# Altium PCB UWB_R_v1.4.PcbDoc (part 1 of 2)
Units mm, origin at the board's own origin, x right, y up, seen from the top; angles counter-clockwise.
Board outline 610.01 x 38.17 mm, 2 copper layers (Top Layer, Bottom Layer); 33 components, 49 nets, 295 pads, 132 vias.
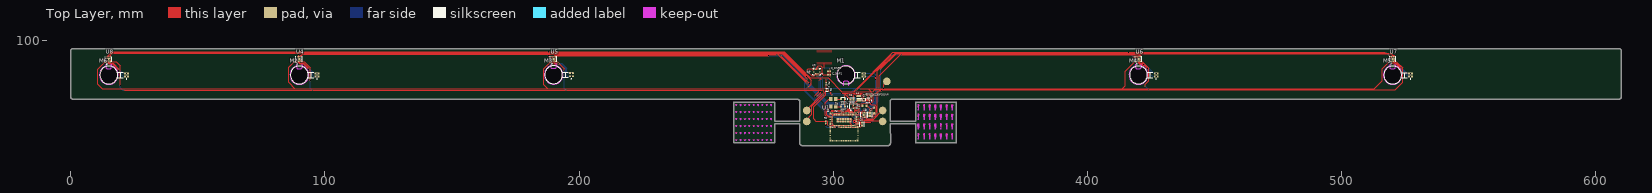
[diagram p0: Top Layer view]
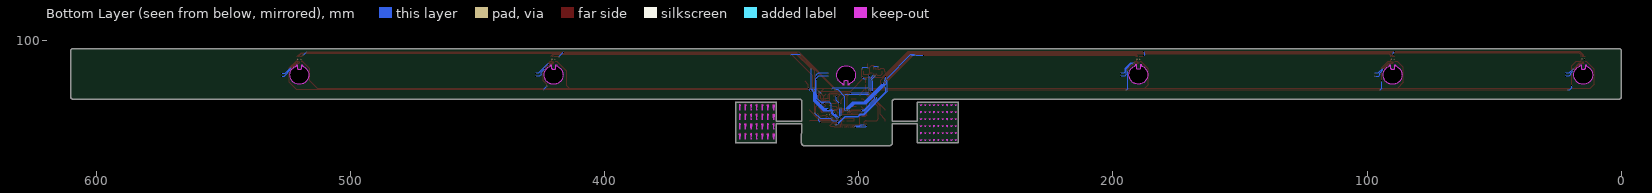
[diagram p1: Bottom Layer view, seen from below]
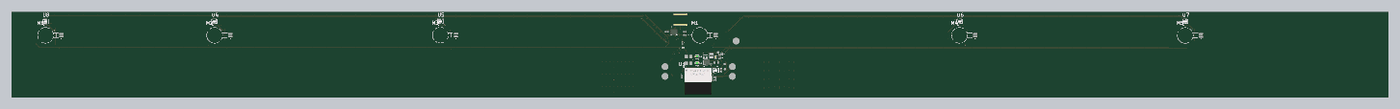
[diagram p3: 3D render of the assembled board from above, using the file's embedded part models]

## Layer stack, top to bottom
Top Layer: signal copper 0.0356
Dielectric 1: dielectric 0.32, FR-4, Dk 4.8
Bottom Layer: signal copper 0.0356

## Board outline
260.896,59.964 276.896,59.964 276.903,59.971 276.903,67.464 286.812,67.464 286.8,59.845 ccw(c287.807,59.843) 287.807,58.836 321.505,58.836 ccw(c321.505,59.843) 322.512,59.843 322.512,59.854 322.429,67.464 332.41,67.464 332.41,59.971 332.416,59.964 348.416,59.964 348.423,59.971 348.423,75.971 348.416,75.978 332.416,75.978 332.41,75.971 332.41,68.478 322.423,68.478 322.334,76.088 cw(c323.327,76.099) 323.327,77.092 609.006,77.092 ccw(c609.006,78.099) 610.013,78.099 610.013,95.995 ccw(c609.006,95.995) 609.006,97.002 1.006,97.002 ccw(c1.006,95.995) 0,95.995 0,78.099 ccw(c1.006,78.099) 1.006,77.092 285.832,77.092 cw(c285.832,76.099) 286.826,76.099 286.826,76.097 286.814,68.478 276.903,68.478 276.903,75.971 276.896,75.978 260.896,75.978 260.889,75.971
cut-out: 346.78,72.827 346.593,74.971 346.693,74.971 346.78,73.975 346.867,74.971 346.968,74.971 346.88,73.966
cut-out: 346.78,69.013 346.593,71.157 346.693,71.157 346.78,70.16 346.867,71.157 346.968,71.157 346.88,70.152
cut-out: 344.38,74.971 344.48,74.971 344.567,73.975 344.655,74.971 344.755,74.971 344.667,73.966 344.567,72.827
cut-out: 342.355,72.827 342.167,74.971 342.267,74.971 342.355,73.975 342.442,74.971 342.542,74.971 342.454,73.966
cut-out: 342.355,69.013 342.167,71.157 342.267,71.157 342.355,70.16 342.442,71.157 342.542,71.157 342.454,70.152
cut-out: 346.593,67.342 346.693,67.342 346.78,66.346 346.867,67.342 346.968,67.342 346.88,66.337 346.78,65.199
cut-out: 346.78,62.532 346.693,63.528 346.593,63.528 346.78,61.384 346.88,62.523 346.968,63.528 346.867,63.528
cut-out: 344.567,69.013 344.38,71.157 344.48,71.157 344.567,70.16 344.655,71.157 344.755,71.157 344.667,70.152
cut-out: 344.567,66.346 344.48,67.342 344.38,67.342 344.567,65.199 344.667,66.337 344.755,67.342 344.655,67.342
cut-out: 342.355,65.199 342.454,66.337 342.542,67.342 342.442,67.342 342.355,66.346 342.267,67.342 342.167,67.342
cut-out: 344.38,63.528 344.48,63.528 344.567,62.532 344.655,63.528 344.755,63.528 344.667,62.523 344.567,61.384
cut-out: 342.355,61.384 342.167,63.528 342.267,63.528 342.355,62.532 342.442,63.528 342.542,63.528 342.454,62.523
cut-out: 340.142,72.827 339.954,74.971 340.055,74.971 340.142,73.975 340.229,74.971 340.329,74.971 340.241,73.966
cut-out: 337.929,73.975 338.016,74.971 338.117,74.971 338.029,73.966 337.929,72.827 337.742,74.971 337.842,74.971
cut-out: 340.142,69.013 339.954,71.157 340.055,71.157 340.142,70.16 340.229,71.157 340.329,71.157 340.241,70.152
cut-out: 337.929,69.013 337.742,71.157 337.842,71.157 337.929,70.16 338.016,71.157 338.117,71.157 338.029,70.152
cut-out: 335.716,72.827 335.816,73.966 335.904,74.971 335.803,74.971 335.716,73.975 335.629,74.971 335.529,74.971
cut-out: 333.503,73.975 333.416,74.971 333.316,74.971 333.503,72.827 333.603,73.966 333.691,74.971 333.591,74.971
cut-out: 335.716,69.013 335.529,71.157 335.629,71.157 335.716,70.16 335.803,71.157 335.904,71.157 335.816,70.152
cut-out: 333.503,70.16 333.416,71.157 333.316,71.157 333.503,69.013 333.603,70.152 333.691,71.157 333.591,71.157
cut-out: 340.142,65.199 339.954,67.342 340.055,67.342 340.142,66.346 340.229,67.342 340.329,67.342 340.241,66.337
cut-out: 337.929,65.199 338.029,66.337 338.117,67.342 338.016,67.342 337.929,66.346 337.842,67.342 337.742,67.342
cut-out: 340.142,62.532 340.229,63.528 340.329,63.528 340.241,62.523 340.142,61.384 339.954,63.528 340.055,63.528
cut-out: 337.929,61.384 338.029,62.523 338.117,63.528 338.016,63.528 337.929,62.532 337.842,63.528 337.742,63.528
cut-out: 335.716,65.199 335.529,67.342 335.629,67.342 335.716,66.346 335.803,67.342 335.904,67.342 335.816,66.337
cut-out: 333.503,65.199 333.316,67.342 333.416,67.342 333.503,66.346 333.591,67.342 333.691,67.342 333.603,66.337
cut-out: 335.716,61.384 335.816,62.523 335.904,63.528 335.803,63.528 335.716,62.532 335.629,63.528 335.529,63.528
cut-out: 333.503,62.532 333.416,63.528 333.316,63.528 333.503,61.384 333.603,62.523 333.691,63.528 333.591,63.528
cut-out: 303.902,82.584 ccw(c304.002,82.584) 304.002,82.484 ccw(c304.002,82.584) 304.102,82.584 304.102,83.775 cw(c304.602,83.775) 304.602,84.275 305.402,84.275 cw(c305.402,83.775) 305.902,83.775 305.902,82.584 ccw(c306.002,82.584) 306.002,82.484 ccw(c306.002,82.584) 306.102,82.584 306.102,82.714 cw(c306.602,82.714) 306.408,83.174 306.407,83.174 ccw(c304.97,86.584) 303.59,83.151 303.589,83.151 cw(c303.402,82.688) 303.902,82.688
cut-out: 14.106,89.429 14.106,90.62 ccw(c14.006,90.62) 14.006,90.72 ccw(c14.006,90.62) 13.906,90.62 13.906,90.491 cw(c13.406,90.49) 13.601,90.03 13.602,90.03 ccw(c15.038,86.62) 16.418,90.053 16.42,90.053 cw(c16.606,90.517) 16.106,90.517 16.106,90.62 ccw(c16.006,90.62) 16.006,90.72 ccw(c16.006,90.62) 15.906,90.62 15.906,89.429 cw(c15.406,89.429) 15.406,88.929 14.606,88.929 cw(c14.606,89.429)
cut-out: 189.075,89.498 189.075,90.688 ccw(c188.975,90.688) 188.975,90.788 ccw(c188.975,90.688) 188.875,90.688 188.875,90.559 cw(c188.375,90.559) 188.569,90.098 188.57,90.099 ccw(c190.006,86.689) 191.388,90.121 cw(c191.575,90.585) 191.075,90.585 191.075,90.688 ccw(c190.975,90.688) 190.975,90.788 ccw(c190.975,90.688) 190.875,90.688 190.875,89.498 cw(c190.375,89.498) 190.375,88.998 189.575,88.998 cw(c189.575,89.498)
cut-out: 189.075,89.498 189.075,90.688 ccw(c188.975,90.688) 188.975,90.788 ccw(c188.975,90.688) 188.875,90.688 188.875,90.559 cw(c188.375,90.559) 188.569,90.098 188.57,90.099 ccw(c190.006,86.689) 191.388,90.121 cw(c191.575,90.585) 191.075,90.585 191.075,90.688 ccw(c190.975,90.688) 190.975,90.788 ccw(c190.975,90.688) 190.875,90.688 190.875,89.498 cw(c190.375,89.498) 190.375,88.998 189.575,88.998 cw(c189.575,89.498)
cut-out: 89.075,89.429 89.075,90.62 ccw(c88.975,90.62) 88.975,90.72 ccw(c88.975,90.62) 88.875,90.62 88.875,90.491 cw(c88.375,90.49) 88.569,90.03 88.57,90.03 ccw(c90.006,86.62) 91.386,90.053 91.388,90.053 cw(c91.575,90.517) 91.075,90.517 91.075,90.62 ccw(c90.975,90.62) 90.975,90.72 ccw(c90.975,90.62) 90.875,90.62 90.875,89.429 cw(c90.375,89.429) 90.375,88.929 89.575,88.929 cw(c89.575,89.429)
cut-out: 89.075,89.429 89.075,90.62 ccw(c88.975,90.62) 88.975,90.72 ccw(c88.975,90.62) 88.875,90.62 88.875,90.491 cw(c88.375,90.49) 88.569,90.03 88.57,90.03 ccw(c90.006,86.62) 91.386,90.053 91.388,90.053 cw(c91.575,90.517) 91.075,90.517 91.075,90.62 ccw(c90.975,90.62) 90.975,90.72 ccw(c90.975,90.62) 90.875,90.62 90.875,89.429 cw(c90.375,89.429) 90.375,88.929 89.575,88.929 cw(c89.575,89.429)
cut-out: 519.075,89.429 519.075,90.62 ccw(c518.975,90.62) 518.975,90.72 ccw(c518.975,90.62) 518.875,90.62 518.875,90.491 cw(c518.375,90.49) 518.569,90.03 518.57,90.03 ccw(c520.006,86.62) 521.386,90.053 521.388,90.053 cw(c521.575,90.517) 521.075,90.517 521.075,90.62 ccw(c520.975,90.62) 520.975,90.72 ccw(c520.975,90.62) 520.875,90.62 520.875,89.429 cw(c520.375,89.429) 520.375,88.929 519.575,88.929 cw(c519.575,89.429)
cut-out: 418.569,90.03 ccw(c420.006,86.619) 421.386,90.053 421.388,90.053 cw(c421.575,90.517) 421.075,90.517 421.075,90.62 ccw(c420.975,90.62) 420.975,90.72 ccw(c420.975,90.62) 420.875,90.62 420.875,89.429 cw(c420.375,89.429) 420.375,88.929 419.575,88.929 cw(c419.575,89.429) 419.075,89.429 419.075,90.62 ccw(c418.975,90.62) 418.975,90.72 ccw(c418.975,90.62) 418.875,90.62 418.875,90.491 cw(c418.375,90.49)
cut-out: 519.075,89.429 519.075,90.62 ccw(c518.975,90.62) 518.975,90.72 ccw(c518.975,90.62) 518.875,90.62 518.875,90.491 cw(c518.375,90.49) 518.569,90.03 518.57,90.03 ccw(c520.006,86.62) 521.386,90.053 521.388,90.053 cw(c521.575,90.517) 521.075,90.517 521.075,90.62 ccw(c520.975,90.62) 520.975,90.72 ccw(c520.975,90.62) 520.875,90.62 520.875,89.429 cw(c520.375,89.429) 520.375,88.929 519.575,88.929 cw(c519.575,89.429)
cut-out: 419.075,89.429 419.075,90.62 ccw(c418.975,90.62) 418.975,90.72 ccw(c418.975,90.62) 418.875,90.62 418.875,90.491 cw(c418.375,90.49) 418.569,90.03 418.57,90.03 ccw(c420.006,86.62) 421.386,90.053 421.388,90.053 cw(c421.575,90.517) 421.075,90.517 421.075,90.62 ccw(c420.975,90.62) 420.975,90.72 ccw(c420.975,90.62) 420.875,90.62 420.875,89.429 cw(c420.375,89.429) 420.375,88.929 419.575,88.929 cw(c419.575,89.429)
cut-out: 303.902,82.584 ccw(c304.002,82.584) 304.002,82.484 ccw(c304.002,82.584) 304.102,82.584 304.102,83.775 cw(c304.602,83.775) 304.602,84.275 305.402,84.275 cw(c305.402,83.775) 305.902,83.775 305.902,82.584 ccw(c306.002,82.584) 306.002,82.484 ccw(c306.002,82.584) 306.102,82.584 306.102,82.714 cw(c306.602,82.714) 306.408,83.174 306.407,83.174 ccw(c304.97,86.584) 303.59,83.151 303.589,83.151 cw(c303.402,82.688) 303.902,82.688
cut-out: 271.87,63.9 272.11,63.484 272.351,63.901 272.235,63.901 272.11,63.684 271.985,63.9
cut-out: 271.87,61.132 272.11,60.716 272.351,61.133 272.235,61.133 272.11,60.916 271.985,61.132
cut-out: 270.274,63.9 270.399,63.684 270.524,63.901 270.639,63.901 270.399,63.484 270.158,63.9
cut-out: 270.274,61.132 270.399,60.916 270.524,61.133 270.639,61.133 270.399,60.716 270.158,61.132
cut-out: 266.736,61.132 266.976,60.716 267.216,61.133 267.101,61.133 266.976,60.916 266.851,61.132
cut-out: 266.736,74.971 266.976,74.555 267.216,74.972 267.101,74.972 266.976,74.755 266.851,74.971
cut-out: 265.024,74.971 265.14,74.971 265.264,74.755 265.39,74.972 265.505,74.972 265.264,74.555
cut-out: 263.313,74.971 263.553,74.555 263.794,74.972 263.678,74.972 263.553,74.755 263.428,74.971
cut-out: 265.024,61.132 265.14,61.132 265.264,60.916 265.39,61.133 265.505,61.133 265.264,60.716
cut-out: 268.447,72.203 268.687,71.787 268.928,72.204 268.812,72.204 268.687,71.987 268.562,72.203
cut-out: 268.562,69.435 268.687,69.219 268.812,69.436 268.928,69.436 268.687,69.019 268.447,69.435
cut-out: 266.736,72.203 266.976,71.787 267.216,72.204 267.101,72.204 266.976,71.987 266.851,72.203
cut-out: 266.736,69.435 266.976,69.019 267.216,69.436 267.101,69.436 266.976,69.219 266.851,69.435
cut-out: 265.024,72.203 265.14,72.203 265.264,71.987 265.39,72.204 265.505,72.204 265.264,71.787
cut-out: 265.024,69.435 265.14,69.435 265.264,69.219 265.39,69.436 265.505,69.436 265.264,69.019
cut-out: 263.313,69.435 263.553,69.019 263.794,69.436 263.678,69.436 263.553,69.219 263.428,69.435
cut-out: 263.313,72.203 263.553,71.787 263.794,72.204 263.678,72.204 263.553,71.987 263.428,72.203
cut-out: 261.601,72.203 261.841,71.787 262.082,72.204 261.967,72.204 261.841,71.987 261.717,72.203
cut-out: 261.601,69.435 261.841,69.019 262.082,69.436 261.967,69.436 261.841,69.219 261.717,69.435
cut-out: 268.562,66.668 268.687,66.452 268.812,66.668 268.928,66.668 268.687,66.252 268.447,66.668
cut-out: 263.313,61.132 263.553,60.716 263.794,61.133 263.678,61.133 263.553,60.916 263.428,61.132
cut-out: 268.447,63.9 268.687,63.484 268.928,63.901 268.812,63.901 268.687,63.684 268.562,63.9
cut-out: 268.562,61.132 268.687,60.916 268.812,61.133 268.928,61.133 268.687,60.716 268.447,61.132
cut-out: 266.736,63.9 266.976,63.484 267.216,63.901 267.101,63.901 266.976,63.684 266.851,63.9
cut-out: 261.717,61.132 261.841,60.916 261.967,61.133 262.082,61.133 261.841,60.716 261.601,61.132
cut-out: 270.274,72.203 270.399,71.987 270.524,72.204 270.639,72.204 270.399,71.787 270.158,72.203
cut-out: 268.447,74.971 268.687,74.555 268.928,74.972 268.812,74.972 268.687,74.755 268.562,74.971
cut-out: 261.601,74.971 261.841,74.555 262.082,74.972 261.967,74.972 261.841,74.755 261.717,74.971
cut-out: 266.736,66.668 266.976,66.252 267.216,66.668 267.101,66.668 266.976,66.452 266.851,66.668
cut-out: 265.024,66.668 265.14,66.668 265.264,66.452 265.39,66.668 265.505,66.668 265.264,66.252
cut-out: 263.313,66.668 263.553,66.252 263.794,66.668 263.678,66.668 263.553,66.452 263.428,66.668
cut-out: 261.601,66.668 261.841,66.252 262.082,66.668 261.967,66.668 261.841,66.452 261.717,66.668
cut-out: 265.024,63.9 265.264,63.484 265.505,63.901 265.39,63.901 265.264,63.684 265.14,63.9
cut-out: 263.313,63.9 263.553,63.484 263.794,63.901 263.678,63.901 263.553,63.684 263.428,63.9
cut-out: 273.581,66.668 273.821,66.252 274.062,66.668 273.947,66.668 273.821,66.452 273.697,66.668
cut-out: 273.581,63.9 273.821,63.484 274.062,63.901 273.947,63.901 273.821,63.684 273.697,63.9
cut-out: 271.87,66.668 272.11,66.252 272.351,66.668 272.235,66.668 272.11,66.452 271.985,66.668
cut-out: 273.581,61.132 273.821,60.716 274.062,61.133 273.947,61.133 273.821,60.916 273.697,61.132
cut-out: 270.274,66.668 270.399,66.452 270.524,66.668 270.639,66.668 270.399,66.252 270.158,66.668
cut-out: 271.87,74.971 272.11,74.555 272.351,74.972 272.235,74.972 272.11,74.755 271.985,74.971
cut-out: 270.158,74.971 270.399,74.555 270.639,74.972 270.524,74.972 270.399,74.755 270.274,74.971
cut-out: 271.87,72.203 272.11,71.787 272.351,72.204 272.235,72.204 272.11,71.987 271.985,72.203
cut-out: 261.601,63.9 261.717,63.9 261.841,63.684 261.967,63.901 262.082,63.901 261.841,63.484
cut-out: 275.293,74.971 275.533,74.555 275.774,74.972 275.658,74.972 275.533,74.755 275.408,74.971
cut-out: 273.581,74.971 273.821,74.555 274.062,74.972 273.947,74.972 273.821,74.755 273.697,74.971
cut-out: 275.293,72.203 275.408,72.203 275.533,71.987 275.658,72.204 275.774,72.204 275.533,71.787
cut-out: 275.293,69.435 275.533,69.019 275.774,69.436 275.658,69.436 275.533,69.219 275.408,69.435
cut-out: 273.581,72.203 273.821,71.787 274.062,72.204 273.947,72.204 273.821,71.987 273.697,72.203
cut-out: 273.581,69.435 273.821,69.019 274.062,69.436 273.947,69.436 273.821,69.219 273.697,69.435
cut-out: 271.87,69.435 272.11,69.019 272.351,69.436 272.235,69.436 272.11,69.219 271.985,69.435
cut-out: 270.158,69.435 270.399,69.019 270.639,69.436 270.524,69.436 270.399,69.219 270.274,69.435
cut-out: 275.293,66.668 275.533,66.252 275.774,66.668 275.658,66.668 275.533,66.452 275.408,66.668
cut-out: 275.293,63.9 275.408,63.9 275.533,63.684 275.658,63.901 275.774,63.901 275.533,63.484
cut-out: 275.293,61.132 275.533,60.716 275.774,61.133 275.658,61.133 275.533,60.916 275.408,61.132

## Design rules (kind name [scope] priority, off if disabled: settings)
Clearance [All] p1: gap=0 ignorepadtopadclearanceinfootprint=TRUE
PolygonConnect [All] p1: connectstyle=Relief reliefconductorwidth=0.254 reliefentries=4 polygonreliefangle="90 Angle" airgapwidth=0.254
RoutingVias [All] p1: holewidth=0.15 width=0.3 viastyle="Through Hole" minholewidth=0.15 minwidth=0.3 maxholewidth=0.15 maxwidth=0.3
SolderMaskExpansion ViaExpansion [isVia] p1: expansion=0 istentingtop=TRUE
SolderMaskExpansion SolderMaskExpansion_1 [All] p2: expansion=0.102 istentingtop=FALSE
SupplyNets "Schematic Supply Nets" [InNet('GND')] p1: voltage=0.000
Width [All] p1: maxlimit=0.254 minlimit=0.1 preferedwidth=0.1 minimp=50.000000 maximp=50.000000 favimp=50.000000
30 further rules are at their usual default settings.

## Components (designator, comment, footprint, x,y, rotation, side; value= is the part's Value field where it differs from the comment)
C1 "10uF" FP-CL05A106MP5NUNC-MFG 312.111,76.88 r270 top
C2 "22uF" FP-GRM188-0_2-IPC_C 314.389,71.125 r270 top
C3 "1 uF" FP-CL10-IPC_C 307.412,76.835 r0 top
C4 "1 uF" FP-CL10-IPC_C 311.349,67.302 r270 top
C5 "0.3 pF" FP-GRM033-0_03-IPC_B 297.583,80.772 r0 top
C_DNP1 "DNP" CAPC1005X56X25NL10T15 298.391,86.741 r0 top
C_DNP2 "DNP" CAPC1005X56X25NL10T15 298.382,88.138 r0 top
D0 "LTST-C190GKT" FP-LTST-C190GKT-MFG 303.784,74.168 r180 top
D1 "LTST-C190GKT" FP-LTST-C190GKT-MFG 303.772,77.089 r180 top
L1 "470 nH" FP-CIGT201610-MFG 310.079,77.47 r270 top
M1 "C0720B001F" XDCR_C0720B001F 306.959,86.614 r90 top
M2 "C0720B001F" XDCR_C0720B001F 91.948,86.614 r90 top
M3 "C0720B001F" XDCR_C0720B001F 191.957,86.706 r90 top
M4 "C0720B001F" XDCR_C0720B001F 422.021,86.614 r90 top
M5 "C0720B001F" XDCR_C0720B001F 522.03,86.579 r90 top
M6 "C0720B001F" XDCR_C0720B001F 17.018,86.614 r90 top
R0 "0" RESC1005X40X25NL05T10 296.998,68.072 r90 top
R0_2 "0" RESC1005X40X25NL05T10 297.252,83.185 r90 top
R1 "511k" RESC1608X55X25ML10T15 312.281,74.422 r0 top
R2 "91k" RESC0603X26X15NL03T05 310.206,73.716 r90 top
R3 "120" RESC2013X50X40ML20T20 299.974,74.168 r0 top
R4 "120" RESC2013X50X40ML20T20 299.974,77.089 r0 top
R5 "100k" RESC1005X40X25ML05T10 290.289,88.138 r0 top
TPS7A0230PDQNR "TPS7A0230PDQNR" Texas_Instruments_DQN0004A_MFG 313.762,76.835 r180 top
U1 "'" ISP3080-UX 304.261,66.19 r0 top
U3 "DRV8837DSGR (H-Bridge)" FP-DSG0008A-MFG 312.035,70.927 r270 top
U4 "DRV8837DSGR (H-Bridge)" FP-DSG0008A-MFG 89.916,92.837 r90 top
U5 "DRV8837DSGR (H-Bridge)" FP-DSG0008A-MFG 189.992,92.837 r90 top
U6 "DRV8837DSGR (H-Bridge)" FP-DSG0008A-MFG 420.116,92.837 r90 top
U7 "DRV8837DSGR (H-Bridge)" FP-DSG0008A-MFG 520.065,92.837 r90 top
U8 "DRV8837DSGR (H-Bridge)" FP-DSG0008A-MFG 14.99,92.771 r90 top
U9 "BMI270" XDCR_BMI270 293.497,88.011 r180 top
U_TPS1 "TPS63802DLAR (Buck Boost)" FP-DLA0010A-MFG 307.948,74.454 r90 top

## Footprints (in the part's own frame and the unit in brackets; to place one, negate y for a bottom-side part, rotate by r counter-clockwise, add the part's x,y. Pads: shape width x height; smd on the part's side, far side on the other; paste and mask are expansions set on the pad)
CAPC1005X56X25NL10T15 [mm] "Chip Capacitor, 2-Leads, Body 1.00x0.50mm, IPC Medium Density"
  rect 0.68x0.64 smd: 1(-0.44,0) 2(0.44,0)
  body extent -0.55,-0.3 0.55,0.3, height 0.56
FP-CIGT201610-MFG [mm]
  rect 0.8x1.8 smd paste+0 mask+0: 1(-0.8,0) 2(0.8,0)
  silkscreen extent 0,-0.9 0,0.9, body extent -1.3,-1 1.3,1, height 0.25
FP-CL05A106MP5NUNC-MFG [mm]
  rect 0.45x0.675 smd paste+0 mask+0: 1(-0.463,0) 2(0.463,0)
  silkscreen extent -0.6,-0.63 0.6,0.63, body extent -0.79,-0.45 0.79,0.45, height 0.25
FP-CL10-IPC_C [mm]
  rect 0.758x0.812 smd paste+0 mask+0: 1(-0.627,0) 2(0.627,0)
  silkscreen extent -1.01,-0.85 1.01,0.85, body extent -1.11,-0.55 1.11,0.55, height 0.25
FP-DLA0010A-MFG [mm]
  rrect40% 0.6x0.25 smd paste+0 mask+0: 1(-0.9,1) 2(-0.9,0.5) 3(-0.9,0) 4(-0.9,-0.5) 5(-0.9,-1)
  rrect40% 0.9x0.25 smd paste+0 mask+0: 6(0.75,-1) 7(0.75,-0.5) 9(0.75,0.5) 10(0.75,1)
  rrect40% 1.3x0.25 smd paste-1000 mask+0: 8(0.55,0)
  silkscreen extent -1.92,-1.55 1.05,1.55, body extent -1.3,-1.65 1.3,1.65, height 0.25
FP-DSG0008A-MFG [mm]
  rrect40% 0.5x0.25 smd paste+0 mask+0: 1(-0.95,0.75) 2(-0.95,0.25) 3(-0.95,-0.25) 4(-0.95,-0.75) 5(0.95,-0.75) 6(0.95,-0.25) 7(0.95,0.25) 8(0.95,0.75)
  rrect11% 0.9x1.6 smd paste-1000 mask+0: 9(0,0)
  silkscreen extent -1.9,-1.25 1.05,1.25, body extent -1.3,-1.15 1.3,1.15, height 0.25
FP-GRM033-0_03-IPC_B [mm]
  rect 0.454x0.363 smd paste+0 mask+0: 1(-0.304,0) 2(0.304,0)
  silkscreen extent -0.53,-0.58 0.53,0.58, body extent -0.68,-0.33 0.68,0.33, height 0.25
FP-GRM188-0_2-IPC_C [mm]
  rect 0.905x0.906 smd paste+0 mask+0: 1(-0.601,0) 2(0.601,0)
  silkscreen extent -1.05,-0.9 1.05,0.9, body extent -1.15,-0.6 1.15,0.6, height 0.25
FP-LTST-C190GKT-MFG [mm]
  rect 0.8x0.8 smd paste+0 mask+0: 1(-0.75,0) 2(0.75,0)
  silkscreen extent -1.92,-0.85 0.85,0.85, body extent -1.25,-0.55 1.25,0.55, height 0.25
ISP3080-UX [mm] "ISP3080-UX module footprint"
  rect 0.8x0.8 smd mask+0.05: 1(-5.3,5.3) 17(-5.3,0) 55(5.3,0) 71(5.3,5.3) 109(2.5,3.15) 110(1.5,3.15) 111(0.5,3.15) 112(-0.5,3.15) 113(-1.5,3.15) 114(-2.5,3.15) 115(2.5,2.15) 116(1.5,2.15) 117(0.5,2.15) 118(-0.5,2.15) 119(-1.5,2.15) 120(-2.5,2.15) 129(-5.3,-5.3) 149(5.3,-5.3)
  rect 0.5x0.3 smd mask+0.05: 2(-5.45,4.4) 3(-4.75,4.15) 4(-5.45,3.9) 5(-4.75,3.65) 6(-5.45,3.4) 7(-4.75,3.15) 8(-5.45,2.9) 9(-4.75,2.65) 10(-5.45,2.4) 11(-4.75,2.15) 12(-5.45,1.9) 13(-4.75,1.65) 14(-5.45,1.4) 15(-4.75,1.15) 16(-5.45,0.9) 56(5.45,0.9) 57(4.75,1.15) 58(5.45,1.4) 59(4.75,1.65) 60(5.45,1.9) 61(4.75,2.15) 62(5.45,2.4) 63(4.75,2.65) 64(5.45,2.9) 65(4.75,3.15) 66(5.45,3.4) 67(4.75,3.65) 68(5.45,3.9) 69(4.75,4.15) 70(5.45,4.4) 121(-5.45,-0.875) 122(-5.45,-1.375) 123(-5.45,-1.875) 124(-5.45,-2.375) 125(-5.45,-2.875) 126(-5.45,-3.375) 127(-5.45,-3.875) 128(-5.45,-4.375) 150(5.45,-4.375) 151(5.45,-3.875) 152(5.45,-3.375) 153(5.45,-2.875) 154(5.45,-2.375) 155(5.45,-1.875) 156(5.45,-1.375) 157(5.45,-0.875)
  rect 0.3x0.5 smd mask+0.05: 18(-4.5,-0.15) 19(-4.25,0.55) 20(-4,-0.15) 21(-3.75,0.55) 22(-3.5,-0.15) 23(-3.25,0.55) 24(-3,-0.15) 25(-2.75,0.55) 26(-2.5,-0.15) 27(-2.25,0.55) 28(-2,-0.15) 29(-1.75,0.55) 30(-1.5,-0.15) 31(-1.25,0.55) 32(-1,-0.15) 33(-0.75,0.55) 34(-0.5,-0.15) 35(-0.25,0.55) 36(0,-0.15) 37(0.25,0.55) 38(0.5,-0.15) 39(0.75,0.55) 40(1,-0.15) 41(1.25,0.55) 42(1.5,-0.15) 43(1.75,0.55) 44(2,-0.15) 45(2.25,0.55) 46(2.5,-0.15) 47(2.75,0.55) 48(3,-0.15) 49(3.25,0.55) 50(3.5,-0.15) 51(3.75,0.55) 52(4,-0.15) 53(4.25,0.55) 54(4.5,-0.15) 72(4.5,5.45) 73(4.25,4.75) 74(4,5.45) 75(3.75,4.75) 76(3.5,5.45) 77(3.25,4.75) 78(3,5.45) 79(2.75,4.75) 80(2.5,5.45) 81(2.25,4.75) 82(2,5.45) 83(1.75,4.75) 84(1.5,5.45) 85(1.25,4.75) 86(1,5.45) 87(0.75,4.75) 88(0.5,5.45) 89(0.25,4.75) 90(0,5.45) 91(-0.25,4.75) 92(-0.5,5.45) 93(-0.75,4.75) 94(-1,5.45) 95(-1.25,4.75) 96(-1.5,5.45) 97(-1.75,4.75) 98(-2,5.45) 99(-2.25,4.75) 100(-2.5,5.45) 101(-2.75,4.75) 102(-3,5.45) 103(-3.25,4.75) 104(-3.5,5.45) 105(-3.75,4.75) 106(-4,5.45) 107(-4.25,4.75) 108(-4.5,5.45) 130(-4.5,-5.45) 131(-4,-5.45) 132(-3.5,-5.45) 133(-3,-5.45) 134(-2.5,-5.45) 135(-2,-5.45) 136(-1.5,-5.45) 137(-1,-5.45) 138(-0.5,-5.45) 139(0,-5.45) 140(0.5,-5.45) 141(1,-5.45) 142(1.5,-5.45) 143(2,-5.45) 144(2.5,-5.45) 145(3,-5.45) 146(3.5,-5.45) 147(4,-5.45) 148(4.5,-5.45)
  silkscreen extent -6.37,6.23 -6.27,6.32, body extent -6.01,-6.01 6.01,6, height 1.53
RESC0603X26X15NL03T05 [mm] "Chip Resistor, 2-Leads, Body 0.60x0.30mm, IPC Medium Density"
  rect 0.45x0.35 smd: 1(-0.325,0) 2(0.325,0)
  body extent -0.32,-0.16 0.32,0.17, height 0.26
RESC1005X40X25ML05T10 [mm] "Chip Resistor, 2-Leads, Body 1.00x0.50mm, IPC Low Density"
  rect 0.7x0.65 smd: 1(-0.475,0) 2(0.475,0)
  body extent -0.53,-0.27 0.53,0.28, height 0.4
RESC1005X40X25NL05T10 [mm] "Chip Resistor, 2-Leads, Body 1.00x0.50mm, IPC Medium Density"
  rect 0.6x0.55 smd: 1(-0.425,0) 2(0.425,0)
  body extent -0.53,-0.27 0.53,0.28, height 0.4
RESC1608X55X25ML10T15 [mm] "Chip Resistor, 2-Leads, Body 1.60x0.80mm, IPC Low Density"
  rect 0.8x1 smd: 1(-0.75,0) 2(0.75,0)
  body extent -0.85,-0.45 0.85,0.45, height 0.55
RESC2013X50X40ML20T20 [mm] "Chip Resistor, 2-Leads, Body 2.00x1.25mm, IPC Low Density"
  rect 1.35x1.55 smd: 1(-0.975,0) 2(0.975,0)
  body extent -1.1,-0.72 1.1,0.72, height 0.5
Texas_Instruments_DQN0004A_MFG [mm]
  round 0.279 smd paste-1000 mask-1000: 1(-0.505,0.33) 2(-0.505,-0.33)
  round 0.251 smd paste-1000 mask-1000: 3(0.459,-0.346) 4(0.459,0.346)
  rect 0.58x0.58 smd rot 135 paste-1000 mask-1000: 5(0,0)
  Top Layer region: -0.66,-0.485 -0.2,-0.485 -0.2,-0.385 -0.41,-0.175 -0.66,-0.175
  Top Layer region: 0.66,-0.485 0.2,-0.485 0.2,-0.385 0.41,-0.175 0.66,-0.175
  Top Layer region: 0.66,0.485 0.2,0.485 0.2,0.385 0.41,0.175 0.66,0.175
  Top Layer region: -0.66,0.485 -0.2,0.485 -0.2,0.385 -0.41,0.175 -0.66,0.175
  silkscreen extent -1.35,-0.9 0.53,0.9, body extent -0.76,-0.63 0.76,0.63, height 0.25
XDCR_BMI270 [mm]
  rect 0.475x0.25 smd: 1(-1.162,0.75) 2(-1.162,0.25) 3(-1.162,-0.25) 4(-1.162,-0.75) 8(1.162,-0.75) 9(1.162,-0.25) 10(1.162,0.25) 11(1.162,0.75)
  rect 0.25x0.475 smd: 5(-0.5,-0.913) 6(0,-0.913) 7(0.5,-0.913) 12(0.5,0.913) 13(0,0.913) 14(-0.5,0.913)
  silkscreen extent -2.08,-1.25 1.5,1.25, body extent -1.5,-1.25 1.5,1.25, height 0.87
XDCR_C0720B001F [mm]
  rrect50% 0.76x1.94 smd: 1(-0.6,-5.02) 2(0.6,-5.02)
  silkscreen extent -3.5,-5.1 3.5,5.47

## Part data
C1: library part CMP-13271-000002-1, "CL05A106MP5NUNC CAP CER 10UF 10V X5R 0402", Manufacturer=Samsung, Manufacturer Part Number=CL05A106MP5NUNC, Temperature="-55°C to +85°C", Temperature Characteristic=X5R, Temperature Coefficient=15%, Temperature Range High=+85°C, Temperature Range Low=-55°C, Tolerance=20%, Voltage Rating=10V, Automotive=No, Capacitance=10uF, Category=Cap, ComponentLink2Description=Datasheet, ComponentLink2URL=http://www.samsungsem.com/kr/support/product-search/mlcc/__icsFiles/afieldfile/2019/05/10/19-CL05A106MP5NUNC.pdf, Device Class L1="Passive Components", Device Class L2=Capacitors, Device Class L3="Ceramic Capacitors", Digikey Description="CAP CER 10UF 10V X5R 0402", Height=0.7mm, Ipc Land Pattern Name=CAPC10050X50, Lead Free=Yes, Material=Ceramic, Octopart=https://octopart.com/cl05a106mp5nunc-samsung-22457395, Package=CL05A106MP5NUNC, RoHS=TRUE
C2: library part CMP-2000-06337-3, "GRM188R61A226ME15D Chip Multilayer Ceramic Capacitors for General Purpose, 0603, 22uF, X5R, 15%, 20%, 10V", Case Code (Imperial)=0603, Case Code (Metric)=1608, Dielectric=X5R, Max Operating Temperature=85°C, Min Operating Temperature=-55°C, Package Quantity=4000, Tolerance=20%, Voltage Rating=10V, Capacitance=22uF, Case/Package=0603, Depth=0.8mm, Height=0.8mm, Lead Free="Lead Free", Length=1.6mm, Material=Ceramic, Mount="Surface Mount", Packaging="Tape and Reel", REACH SVHC="No SVHC", Termination=SMD/SMT, Thickness=0.039inch, Voltage Rating (DC)=10V, Weight=0.000222oz, Width=0.8mm
C3 C4: library part CMP-2000-06094-2, "CL10B105KP8NNNC Cap Ceramic 1uF 10V X7R ±10% Pad SMD 0603 +125°C T/R", Capacitance=1uF, Case Code (Imperial)=0603, Case Code (Metric)=1608, Dielectric=X7R, Max Operating Temperature=125°C, Min Operating Temperature=-55°C, Package Quantity=1, Tolerance=10%, Voltage Rating=10V, Case/Package=0603, Contact Plating=Tin, Depth=0.8mm, Height=0.8mm, Lead Free="Lead Free", Length=1.6mm, Mount="Surface Mount", Packaging="Tape and Reel", Radiation Hardening=No, Thickness=0.035inch, Voltage Rating (DC)=10V, Width=0.031inch
C5: library part CMP-2010-01482-2, "GRM0335C1ER30BA01D", Capacitance=0.3pF, Case Code (Imperial)=0201, Case Code (Metric)=0603, Dielectric=C0G, Max Operating Temperature=125°C, Min Operating Temperature=-55°C, Package Quantity=15000, Voltage Rating=25V, Case/Package=0201, Height=0.3mm, Length=0.024inch, Mount="Surface Mount", Packaging="Tape and Reel", Termination=SMD/SMT, Thickness=0.013inch, Voltage Rating (DC)=25V, Width=0.3mm
C_DNP1 C_DNP2: library part CMP-1034-00866-2, Manufacturer="AVX Interconnect / Elco", Part Number=04025A180KAT2A
D0 D1: library part CMP-22017-000005-2, "LED GREEN CLEAR CHIP SMD", Case Code (Imperial)=0603, Case Code (Metric)=1608, Color=Green, Forward Current=30mA, Forward Voltage=2.1V, Lens Color=Colorless, Max Operating Temperature=85°C, Min Operating Temperature=-55°C, Package Quantity=1, Power Dissipation=100mW, Reverse Voltage=5V, Test Current=10mA, Voltage=2V, Case/Package=0603, Depth=0.8mm, Dominant Wavelength=569nm, Height=0.8mm, Illumination Color=Green, Lead Free="Lead Free", Length=1.6mm, Lens Style=Clear, Lens Transparency=Clear, Luminous Intensity=6mcd, Mount="Surface Mount", Number of Elements=1, Number of LEDs=1, Number of Pins=2, Packaging="Tape and Reel", Power Rating=100mW, Radiation Hardening=No, Viewing Angle=130°, Wavelength=565nm, Width=0.8mm
L1: library part CMP-13278-000008-1, "CIGT201610EHR47MNE FIXED IND 470NH 4.8A 22MOHM SMD", Case Code (Imperial)=0806, Case Code (Metric)=2016, Current Rating=4.8A, DC Resistance (DCR)=22mR, Inductance=470nH, Max Operating Temperature=125°C, Min Operating Temperature=-40°C, Resistor Type="Thin Film", Saturation Current=5.9A, Test Frequency=1MHz, Tolerance=20%, Case/Package=0806, Core Material=Metal, Mount="Surface Mount", Packaging="Cut Tape", RoHS Compliant=Yes, Series=CIGT, Shielding=Unshielded
M1 M2 M3 M4 M5 M6: "DC Motor Vibration, ERM 10000 RPM 3VDC", Package="Jinlong Machinery", Availability=Unavailable, MF="Jinlong Machinery", MP=C0720B001F, Price=None, SnapEDA_Link=https://www.snapeda.com/parts/C0720B001F/Jinlong%20Machinery%20%26%20Electronics%2C%20Inc./view-part/645169/?ref=snap
R0 R0_2: library part CMP-1011-00001-2, "RC0402JR-070RL", Manufacturer="Yageo / Phycomp", Part Number=RC0402JR-070RL
R1: library part CMP-2000-04074-1, "RC0603FR-07511KL", Manufacturer=Yageo, Part Number=RC0603FR-07511KL
R2: library part CMP-2004-03561-1, "ERJ1GNF9102C", Manufacturer=Panasonic, Part Number=ERJ1GNF9102C
R3 R4: library part CMP-2001-04810-1, "RG2012N-121-W-T1", Manufacturer=Susumu, Part Number=RG2012N-121-W-T1
R5: library part CMP-2002-07167-1, "RC0402FR-07402KL", Manufacturer="Yageo / Phycomp", Part Number=RC0402FR-07402KL
TPS7A0230PDQNR: "Linear Voltage Regulator IC, 1 Output, 6-1.5 V to 0.8-5 V (Fixed) Output, 200mA, 4-X2SON (1x1)", Digikey Part Number=296-TPS7A0230PDQNRCT-ND, Dropout Voltage=310mV, Manufacturer="Texas Instruments", Max Junction Temp=+125°C, Max Supply Voltage=6V, Min Supply Voltage=1.5V, Mouser Part Number=595-TPS7A0230PDQNR, Nominal Supply Current=0.025uA, Output Current=200mA, Output Voltage=3V, Package=DQN0004A, Temperature="-40°C to +125°C", Temperature Range Low=-40°C, Accuracy Percentage=1.5%, Automotive=No, ComponentLink1Description=Upverter, ComponentLink1URL=https://upverter.com/part/id/efb1ed112b5b9d75/, ComponentLink2Description=Datasheet, ComponentLink2URL=https://www.ti.com/lit/ds/symlink/tps7a02.pdf, Datasheet Path=datasheets/IC_Texas_Instruments_TPS7A0230PDQNR_eec.pdf, Digikey Description="NANOPOWER LDO", Height=0.4mm, helpURL=https://upverter.com/part/id/efb1ed112b5b9d75/, Lead Free=Yes, Number of Outputs=1, Output Type=Fixed, Part Number=TPS7A0230PDQNR, RoHS=TRUE, Standoff Height=0mm, Supplier 1=Digi-Key, Supplier 2=Mouser, Supplier Part Number 1=296-TPS7A0230PDQNRCT-ND, Supplier Part Number 2=595-TPS7A0230PDQNR, Symbol Hash=259b0d140b6f650e9c7638141f7cf96fb484ba133eb2d14c3f1df3439be7db40, Temperature Range High=+125°C, Verification Version=0.0.0.3
U1: library part ISP3080-UX, "BLE & UWB module (Revision C)"
U3 U4 U5 U6 U7 U8: library part CMP-04915-000004-1, "IC MOTOR DRIVER PAR 8WSON", Ambient Temperature Range High=+85°C, Ambient Temperature Range Low=-40°C, Manufacturer="Texas Instruments", Manufacturer Part Number=DRV8837DSGR, Max Junction Temp=+150°C, Max Supply Voltage=7V, Min Supply Voltage=1.8V, Nominal Supply Current=300-700uA, Output Current=1.8A, Output Voltage=0-11V, Package=DSG0008A, Switching Frequency=0-250kHz, Temperature="-40°C to +85°C", Automotive=No, Category=IC, ComponentLink2Description=Datasheet, ComponentLink2URL=http://www.ti.com/lit/ds/symlink/drv8837.pdf, Device Class L1="Integrated Circuits (ICs)", Device Class L2="Power Management ICs", Device Class L3="Motor Drivers", Digikey Description="IC MOTOR DRIVER PAR 8WSON", Height=0.8mm, Lead Free=Yes, Motor Type=Brushed, Mouser Description="Motor / Motion / Ignition Controllers & Drivers 1.8A Low Vltg Brush DC Motor Driver", Number of Outputs=2, Octopart=https://octopart.com/drv8837dsgr-texas+instruments-23786726, RoHS=TRUE, Standoff Height=0mm, Temperature Range High=+85°C, Temperature Range Low=-40°C
U9: "Accelerometer, Gyroscope, 6 Axis Sensor IÂ²C, SPI Output", Package="LGA-14 Bosch Sensortec", Check_prices=https://www.snapeda.com/parts/BMI270/Bosch+Sensortec/view-part/?ref=eda, Digi-Key_Part_Number=828-1091-2-ND, MF="Bosch Sensortec", MP=BMI270, Purchase-URL=https://pricing.snapeda.com/search/part/BMI270/?ref=eda, SnapEDA_Link=https://www.snapeda.com/parts/BMI270/Bosch+Sensortec/view-part/?ref=snap
U_TPS1: library part CMP-04918-000005-1, "IC POWER MANAGEMENT", Manufacturer="Texas Instruments", Manufacturer Part Number=TPS63802DLAR, Max Junction Temp=+125°C, Max Supply Voltage=5.5V, Min Supply Voltage=1.3V, Nominal Supply Current=11uA, Output Current=2A, Output Voltage=1.8-5.2V, Package=DLA0010A, Switching Frequency=1.4/1.6/2.1MHz, Temperature="-40°C to +125°C", Temperature Range Low=-40°C, Automotive=No, Category=IC, ComponentLink2Description=Datasheet, ComponentLink2URL=https://www.ti.com/lit/ds/symlink/tps63802.pdf, Device Class L1="Integrated Circuits (ICs)", Device Class L2="Power Management ICs", Device Class L3="Voltage Regulators - Switching", Digikey Description="IC POWER MANAGEMENT", Height=1mm, Lead Free=Yes, Max Duty Cycle=100%, Mouser Description="2-A, high-efficient, 11-µA quiescent current buck-boost converter in QFN/DFN package 10-VSON-HR -40 to 125", Number of Outputs=1, Octopart=https://octopart.com/tps63802dlar-texas+instruments-97359678, Output Type=AdjustableProgrammable, RoHS=TRUE, Standoff Height=0mm, Switching Topology=Buck-Boost, Temperature Range High=+125°C

## Free pads (board coordinates)
  round 3 smd mask-2539.97: 13(289.56,72.644) 14(289.56,68.326) 15(319.405,72.644) 16(319.405,68.326) 18(321.056,84.074)
  round 1 smd mask+0: 19(313.055,78.994) 20(314.96,78.232) 21(316.103,71.501) 22(315.976,73.787)

## Via types
v1: diameter 0.3, hole 0.15, Top Layer to Bottom Layer, tented both sides, 97 vias
v2: diameter 0.3, hole 0.15, Top Layer to Bottom Layer, 23 vias
v3: diameter 0.5, hole 0.2, Top Layer to Bottom Layer, 12 vias

## Nets (pads, with @x,y where several pads share a name; then routed paths per layer and width w, separated by ;. In a path a pad name is that pad's centre, name@x,y a point inside that pad or via, vN(x,y) a via of type N, cw(c..) or ccw(c..) an arc to the next point about the centre after c; other vN are vias at no path point)
ANT_MONO: C_DNP1.2 C_DNP2.2 R0_2.2 | length 10.8
  Top Layer w0.1: v1(296.418,89.408) 296.418,91.084 ; v1(297.246,84.992) 297.252,84.985 R0_2.2@297.252,83.61 ; v1(298.577,85.725) 298.831,85.979 C_DNP1.2@298.831,86.741 298.822,86.75 C_DNP2.2@298.822,88.138 298.831,88.147 v1(298.831,89.027)
  Bottom Layer w0.1: v1(296.418,89.408) 298.577,89.408 298.831,89.154 v1(298.831,89.027) ; v1(297.246,84.992) 297.844,84.992 v1(298.577,85.725)
DW_RF1: C5.1 R0.2 R0_2.1 U1.26 | length 27.4
  Top Layer w0.1: R0_2.1@297.252,82.76 297.252,80.798 C5.1@297.278,80.772 297.233,80.772 296.998,80.537 296.998,78.822 292.227,74.051 292.227,69.342 293.072,68.497 R0.2@296.998,68.497 297.081,68.58 297.506,68.58 297.887,68.199 v2(297.887,66.802)
  Bottom Layer w0.1: v2(297.887,66.802) 297.906,66.821 299.392,66.821 299.792,66.421 301.38,66.421 v2(301.761,66.04)